# Altium PCB Orient3.PcbDoc (part 1 of 2)
Units mil, origin at the board's own origin, x right, y up, seen from the top; angles counter-clockwise.
Board outline 1900 x 1950 mil, 2 copper layers (Top Layer, Bottom Layer); 77 components, 65 nets, 289 pads, 114 vias.
Unrouted connection lines stored in the file: 34.
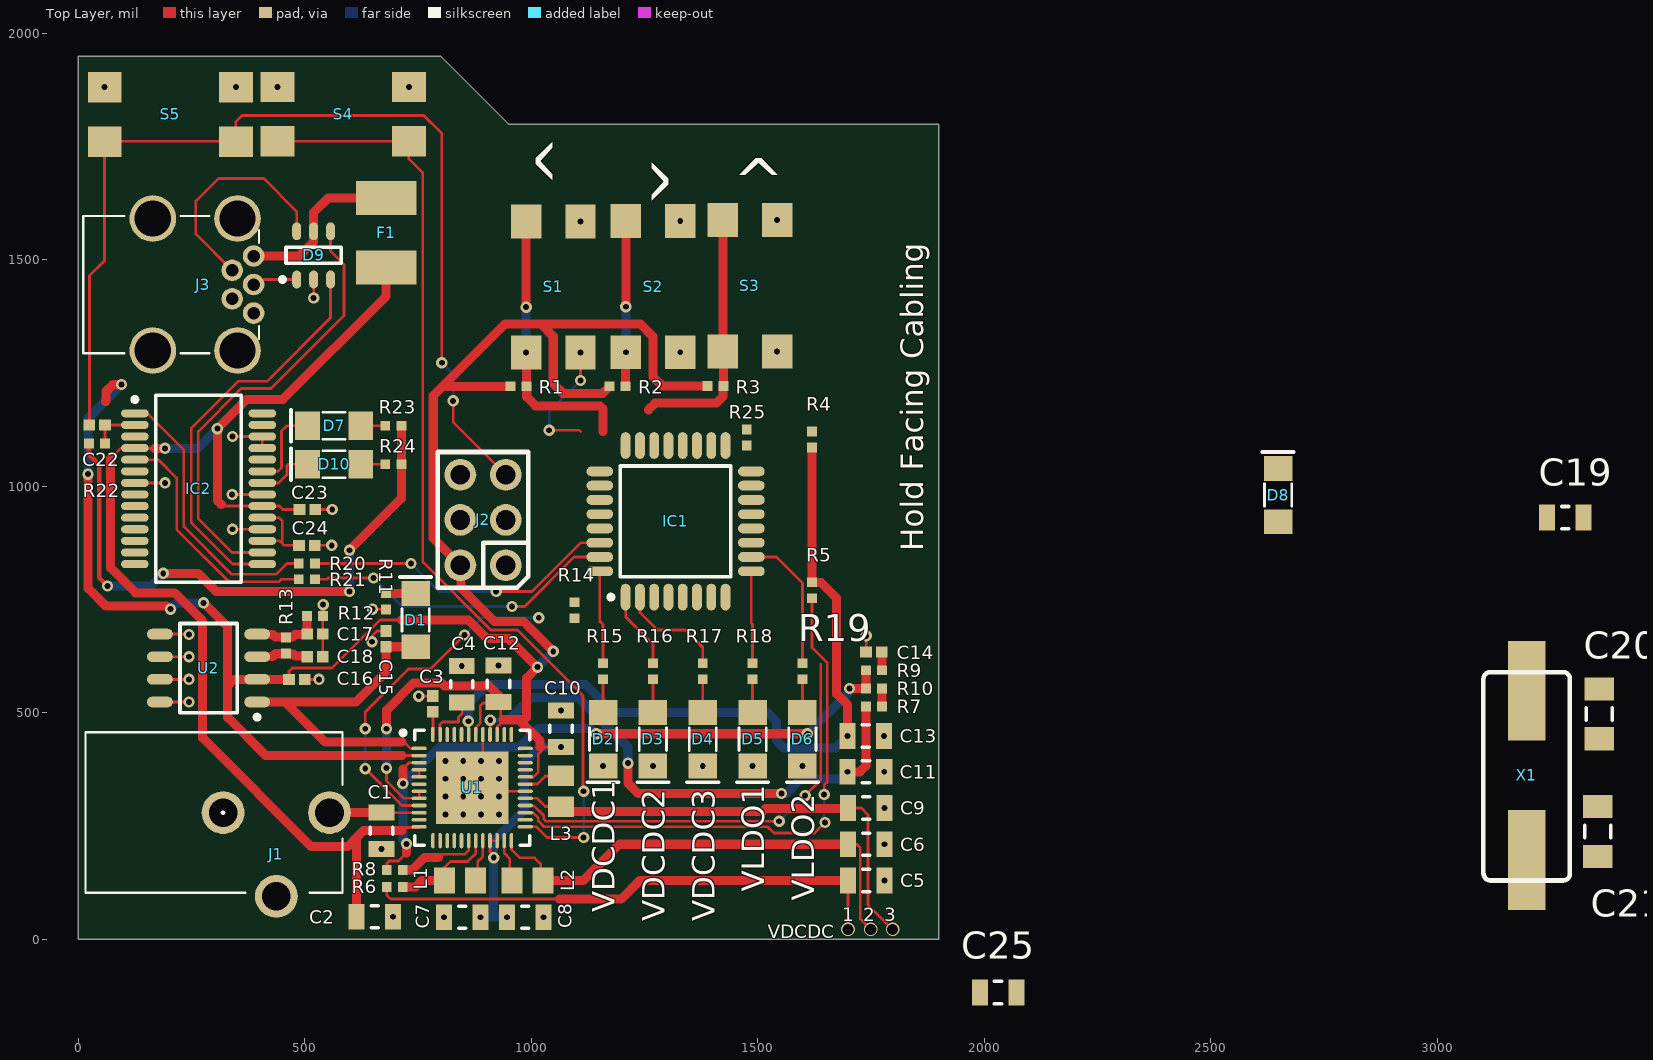
[diagram p0: Top Layer view]
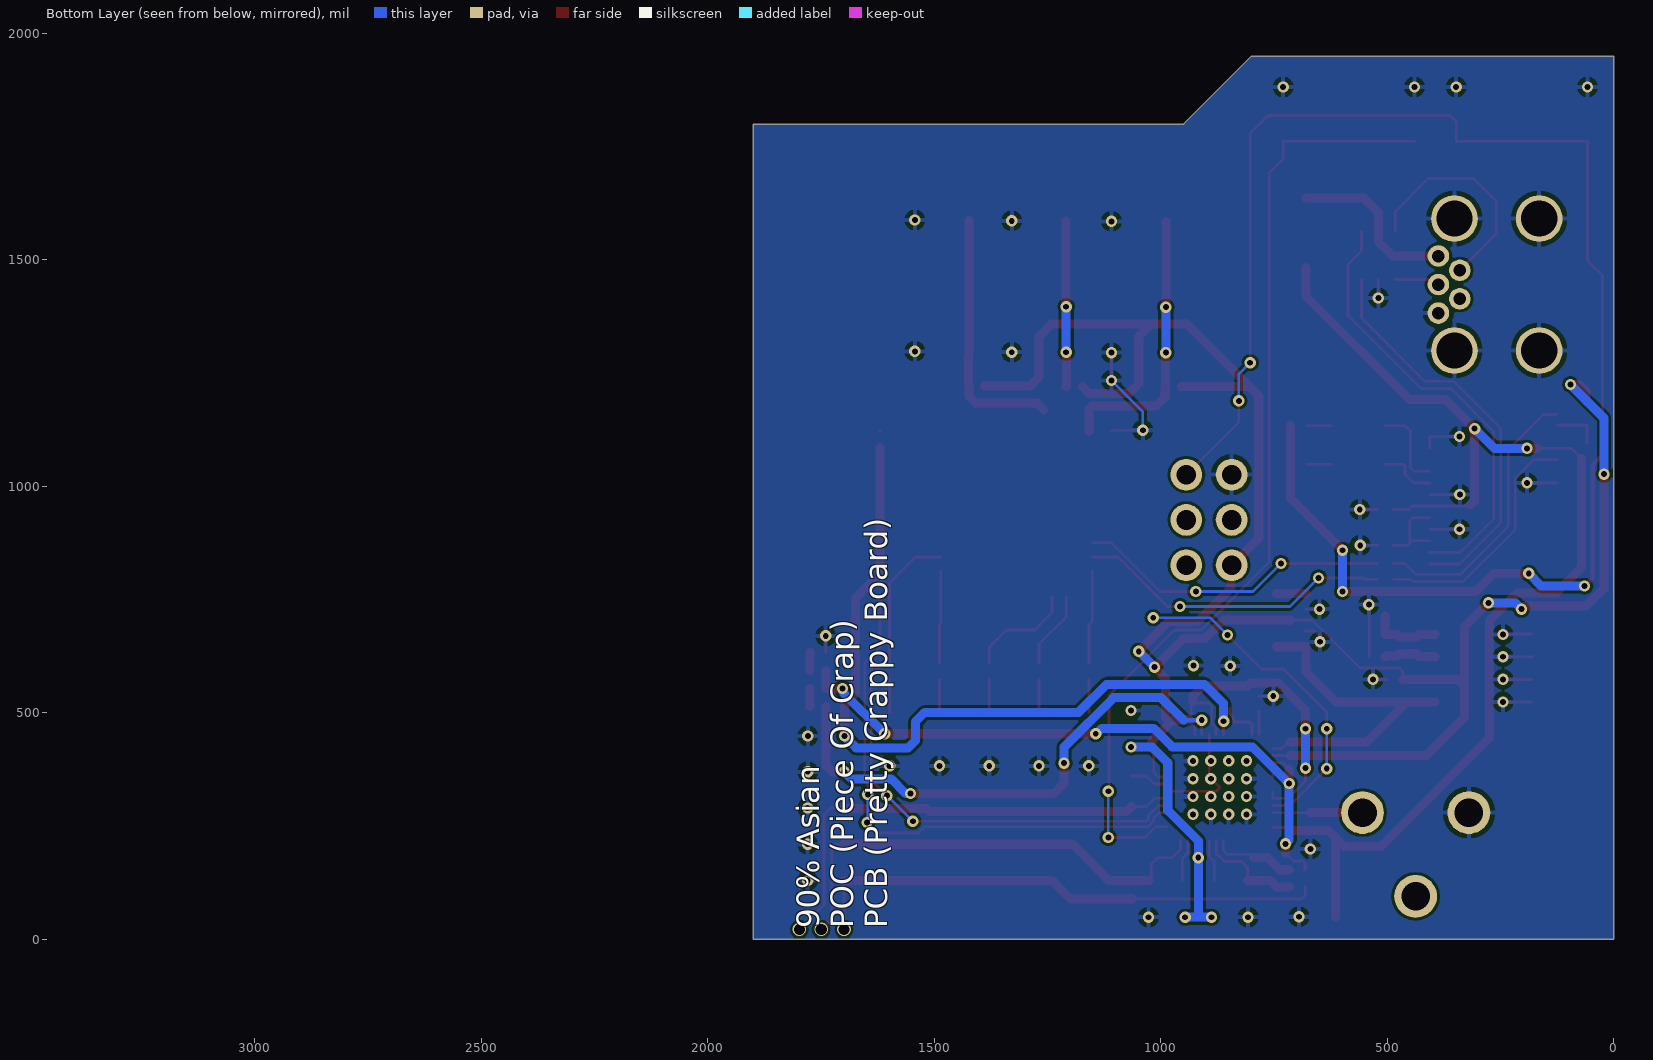
[diagram p1: Bottom Layer view, seen from below]
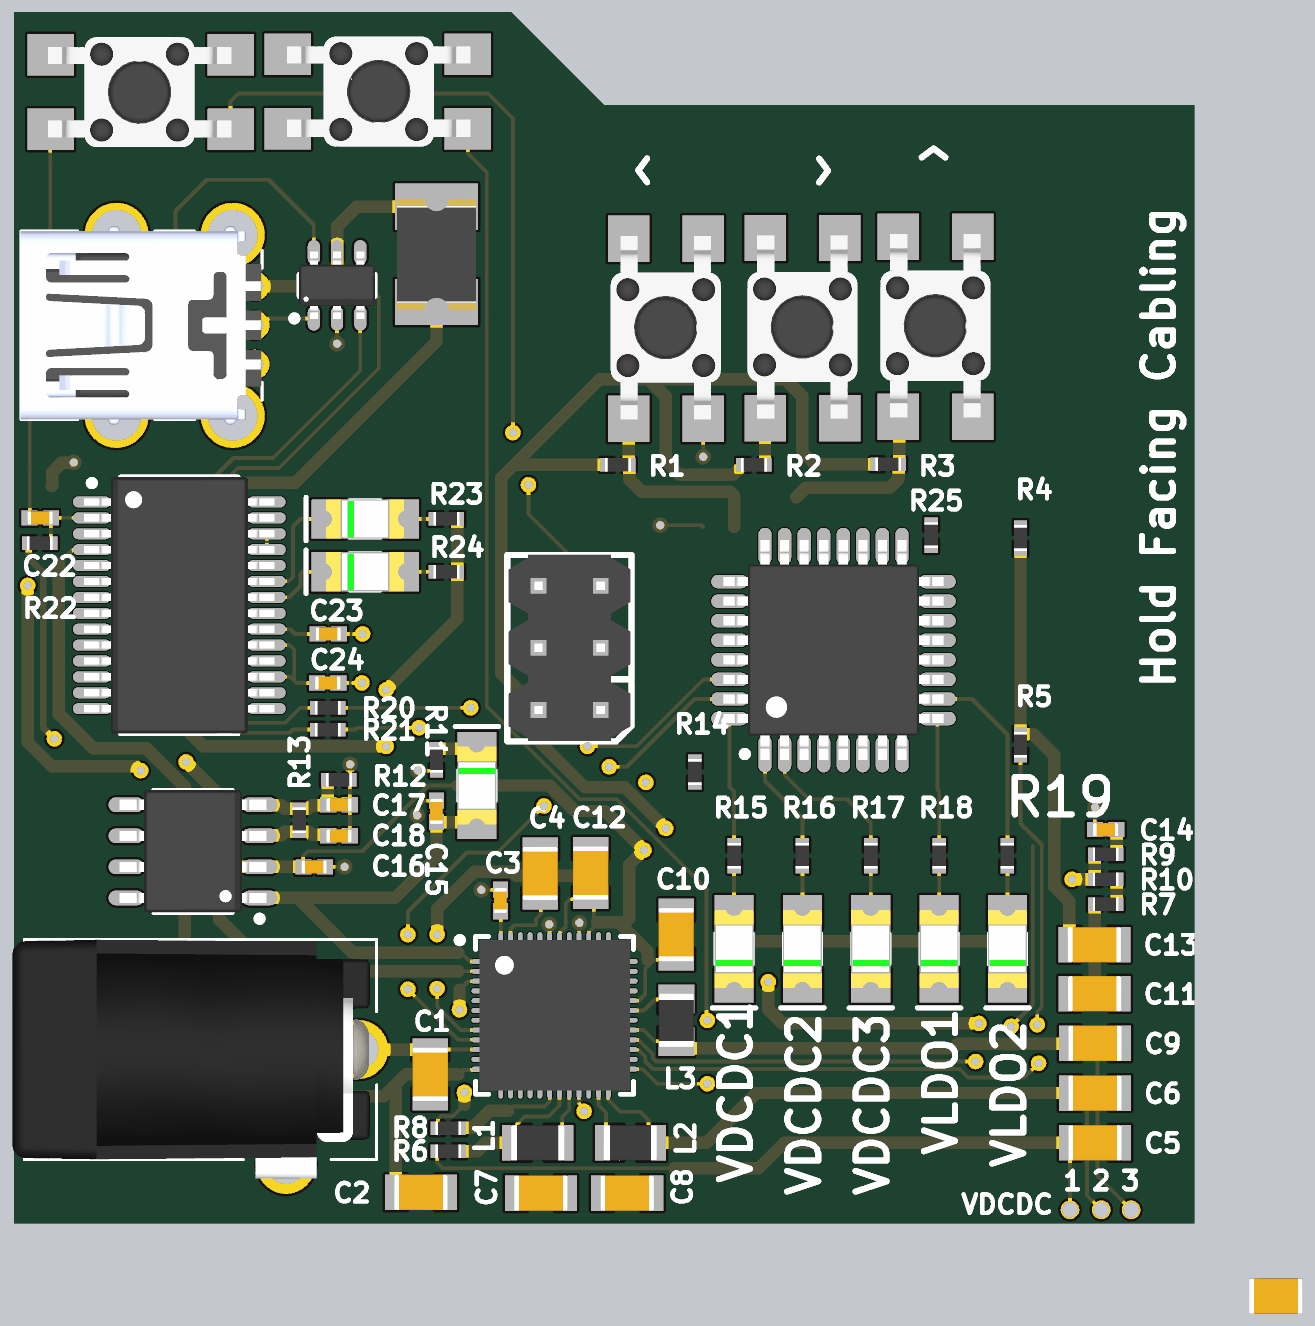
[diagram p2: 3D render of the assembled board from above, using the file's embedded part models]

## Layer stack, top to bottom
Top Solder: solder mask 0.4, Solder Resist, Dk 3.5
Top Layer: signal copper 1.4
Dielectric 1: dielectric 12.6, FR-4, Dk 4.8
Bottom Layer: signal copper 1.4
Bottom Solder: solder mask 0.4, Solder Resist, Dk 3.5

## Board outline
800,1950 950,1800 1900,1800 1900,0 0,0 0,1950

## Design rules (kind name [scope] priority, off if disabled: settings)
Clearance [All] p1: gap=6 ignorepadtopadclearanceinfootprint=FALSE except(0: Arc-Hole Track-Hole SMDPad-Hole THPad-Hole Via-Hole Fill-Hole Poly-Hole Region-Hole Text-Hole)
PlaneConnect [All] p1: pad.planeconnectstyle=Relief pad.reliefexpansion=20 pad.reliefentries=4 pad.reliefconductorwidth=10 pad.reliefairgap=10 via.planeconnectstyle=Direct via.reliefexpansion=20 via.reliefentries=4 via.reliefconductorwidth=10 via.reliefairgap=10
PolygonConnect [All] p1: connectstyle=Relief reliefconductorwidth=10 reliefentries=4 polygonreliefangle="90 Angle" airgapwidth=10
RoutingVias [All] p1: holewidth=13 width=25 viastyle="Through Hole" minholewidth=13 minwidth=25 maxholewidth=28 maxwidth=50
SolderMaskExpansion [All] p1: expansion=4
Width [All] p1: maxlimit=20 minlimit=6 preferedwidth=6 minimp=50.000000 maximp=50.000000 favimp=50.000000
29 further rules are at their usual default settings.

## Classes and differential pairs
component class POC_Power_Management: C1 C2 C3 C4 C5 C6 C7 C8 C9 C10 C11 C12 C13 C14 C15 C16 C17 C18 C19 C20 C24 C25 D1 D2 D3 D4 D5 D6 D7 D8 D9 F1 IC1 IC2 J1 J2 J3 L1 L2 L3 R1 R3 R9 R13 R14 R17 R19 R20 R22 R23 R24 S1 S3 U1 U2 X1

## Components (designator, comment, footprint, x,y, rotation, side; value= is the part's Value field where it differs from the comment)
C1 "C2012X6S1A106K085AC" CAP0805 670,240 r270 top
C2 "C2012X6S1A106K085AC" CAP0805 655,50 r0 top
C3 "C0402C104K4RACTU" CAP0402 783,520 r90 top
C4 "C2012X6S1A106K085AC" CAP0805 847,563.35 r90 top
C5 "C2012X6S1A106K085AC" CAP0805 1740,130 r180 top
C6 "C2012X6S1A106K085AC" CAP0805 1740,210 r180 top
C7 "C2012X6S1A106K085AC" CAP0805 848,49 r180 top
C8 "C2012X6S1A106K085AC" CAP0805 987,49 r0 top
C9 "C2012X6S1A106K085AC" CAP0805 1740,290 r180 top
C10 "C2012X6S1A106K085AC" CAP0805 1066,465 r90 top
C11 "C2012X6S1A106K085AC" CAP0805 1739.28,370 r180 top
C12 "C2012X6S1A106K085AC" CAP0805 928,564 r90 top
C13 "C2012X6S1A106K085AC" CAP0805 1739,449 r180 top
C14 "C1005X5R0J225K050BC" CAP0402 1757,634 r0 top
C15 "C1005X5R0J225K050BC" CAP0402 680,663.32 r270 top
C16 "C1005X5R0J225K050BC" CAP0402 483,574 r0 top
C17 "GRM155R71H471KA01D" CAP0402 523,674 r0 top
C18 "C0402C104K4RACTU" CAP0402 523,624 r0 top
C19 "CL21A226MQQNNNE" CAP0805 3283,931 r0 top value="CAP CER 22UF 16V X5R 1206"
C20 "22pF" CAP1206 3358,498 r90 top value="CAP CER 22PF 16V C0G/NP0 1206"
C21 "22pF" CAP1206 3355,238 r270 top value="CAP CER 22PF 16V C0G/NP0 1206"
C22 "CC0402KRX5R5BB105" CAP0402 42,1135.75 r180 top value="CAP CER 1UF 16V X7R 1206"
C23 "CL21A226MQQNNNE" CAP0402 506,949 r180 top value="CAP CER 22UF 16V X5R 1206"
C24 "CL21A226MQQNNNE" CAP0402 505,870 r180 top value="CAP CER 22UF 16V X5R 1206"
C25 "CL21A226MQQNNNE" CAP0805 2031,-117 r0 top value="CAP CER 22UF 16V X5R 1206"
D1 "Red" LED 745,705 r0 top value="LED RED CLEAR 1206 SMD"
D2 "Red" LED 1159,442 r180 top value="LED RED CLEAR 1206 SMD"
D3 "Red" LED 1269,442 r180 top value="LED RED CLEAR 1206 SMD"
D4 "Red" LED 1379,442 r180 top value="LED RED CLEAR 1206 SMD"
D5 "Red" LED 1489,442 r180 top value="LED RED CLEAR 1206 SMD"
D6 "Red" LED 1599,442 r180 top value="LED RED CLEAR 1206 SMD"
D7 "Red" LED 565,1134 r90 top value="LED RED CLEAR 1206 SMD"
D8 "Red" LED 2649,981 r0 top value="LED RED CLEAR 1206 SMD"
D9 "IP4234CZ6,125" TSOP-6 520,1510 r90 top value="TVS DIODE 5.5V 6TSOP"
D10 "Red" LED 565,1049 r90 top value="LED RED CLEAR 1206 SMD"
F1 "MF-MSMF050-2" FUSE 680,1560 r90 top value="PTC RESET FUSE 15V 500MA 1812"
IC1 "ATMEGA328P-ANR" TQFP-32 1319,923 r90 top value="IC MCU 8BIT 32KB FLASH 32TQFP"
IC2 "FT232RL" SSOP-28 266,995 r0 top value="IC USB FS SERIAL UART 28-SSOP"
J1 "Power Jack" Power_Jack 555,280 r180 top value="CONN PWR JACK 2X5.5MM SOLDER"
J2 "ICSP Header" ICSP 894,926 r180 top
J3 "XM7D-0512" XM7D-0512 160,1591.34 r0 top value="CONN RCPT USB2.0 MINI B 5P R/A"
L1 "150OHM800mA" FB0805 843,130 r180 top
L2 "150OHM800mA" FB0805 992,130 r0 top
L3 "150OHM800mA" FB0805 1066,327 r270 top
R1 "RC0402FR-07100KL" RES0402 972,1221 r0 top
R2 "RC0402FR-07100KL" RES0402 1191,1221 r0 top
R3 "RC0402FR-07100KL" RES0402 1407,1222 r0 top
R4 "RC0402FR-071K5L" RES0402 1620,1103.34 r270 top
R5 "RC0402FR-071K5L" RES0402 1620,770.66 r90 top
R6 "RC0402JR-070RL" RES0402 699,116 r180 top
R7 "RC0402JR-070RL" RES0402 1757,514 r0 top
R8 "RC0402JR-070RL" RES0402 699,153 r0 top
R9 "RC0402JR-070RL" RES0402 1757,594 r0 top
R10 "RC0402JR-070RL" RES0402 1757,554 r0 top
R11 "RC0402FR-07820RL" RES0402 680,746.28 r270 top
R12 "RC0402FR-07470KL" RES0402 523,714 r180 top
R13 "RC0402FR-07280KL" RES0402 459,649 r270 top
R14 "RC0402FR-071KL" RES0402 1096,726.72 r90 top value="RES 1K OHM 1% 1/2W 1206"
R15 "RC0402FR-07820RL" RES0402 1159,592 r90 top
R16 "RC0402FR-07820RL" RES0402 1269,592 r90 top
R17 "RC0402FR-07820RL" RES0402 1379,592 r90 top
R18 "RC0402FR-07820RL" RES0402 1489,592 r90 top
R19 "RC0402FR-07820RL" RES0402 1599,592 r90 top
R20 "RC0402FR-071KL" RES0402 505,830 r0 top value="RES 1K OHM 1% 1/2W 1206"
R21 "RC0402FR-071KL" RES0402 505,795 r0 top value="RES 1K OHM 1% 1/2W 1206"
R22 "RC0402FR-071KL" RES0402 41.5,1095 r180 top value="RES 1K OHM 1% 1/2W 1206"
R23 "RC0402FR-071KL" RES0402 696,1134 r0 top value="RES 1K OHM 1% 1/2W 1206"
R24 "RC0402FR-071KL" RES0402 696,1049 r0 top value="RES 1K OHM 1% 1/2W 1206"
R25 "RC0402FR-071KL" RES0402 1476,1108 r270 top value="RES 1K OHM 1% 1/2W 1206"
S1 "TL3305AF160QG" Switch 1051,1442 r0 top value="SWITCH TACTILE SPST-NO 50MA 12V"
S2 "TL3305AF160QG" Switch 1271,1443 r0 top value="SWITCH TACTILE SPST-NO 50MA 12V"
S3 "TL3305AF160QG" Switch 1485,1445 r0 top value="SWITCH TACTILE SPST-NO 50MA 12V"
S4 "TL3305AF160QG" Switch 587,1820 r270 top value="SWITCH TACTILE SPST-NO 50MA 12V"
S5 "TL3305AF160QG" Switch 202,1823 r90 top value="SWITCH TACTILE SPST-NO 50MA 12V"
U1 "TPS65217C" PVQFN-48 870,335 r0 top
U2 "TL5209" SOIC-8 288,599 r180 top
X1 "16MHz" Crystal 3198,362 r90 top value="CRYSTAL 16.0000MHZ 18PF SMD"

## Footprints (in the part's own frame and the unit in brackets; to place one, negate y for a bottom-side part, rotate by r counter-clockwise, add the part's x,y. Pads: shape width x height; smd on the part's side, far side on the other; paste and mask are expansions set on the pad)
CAP0402 [mm] "Chip Capacitor, 2-Leads, Body 1.00x0.50mm, IPC Medium Density"
  rect 0.66x0.62 smd: 1(-0.44,0) 2(0.44,0)
  body extent -0.53,-0.28 0.53,0.28, height 0.55
CAP0805 [mm] "Chip Capacitor, 2-Leads, Body 2.00x1.25mm, IPC Medium Density"
  rect 0.9x1.45 smd: 1(-1.025,0) 2(1.025,0)
  silkscreen extent -0.2,-0.63 0.2,0.63, body extent -1.1,-0.72 1.1,0.72, height 1.45
CAP1206 [mm] "Chip Capacitor, 2-Leads, Body 3.20x1.50mm, IPC Medium Density"
  rect 1.3x1.65 smd: 1(-1.4,0) 2(1.4,0)
  silkscreen extent -0.35,-0.72 0.35,0.72, body extent -1.7,-0.8 1.7,0.8, height 0.56
Crystal [mm]
  rect 5.6x2.1 smd: 1(-4.75,0) 2(4.75,0)
  silkscreen extent -5.89,-2.43 5.79,2.42, body extent -6.7,-2.43 6.6,2.42, height 4
FB0805 [mm] "Chip Inductor, 2-Leads, Body 2.00x1.25mm, IPC Medium Density"
  rect 1.17x1.47 smd: 1(-0.87,0) 2(0.87,0)
  body extent -1.1,-0.72 1.1,0.72, height 1.1
FUSE [mm]
  rect 1.9x3.4 smd: 1(1.95,0) 2(-1.95,0)
  body extent -2.28,-1.62 2.27,1.62, height 0.68
ICSP [mil]
  round 70 hole 43.31: 1(-50,100) 2(50,100) 3(-50,0) 4(50,0) 5(-50,-100) 6(50,-100)
  silkscreen extent -100,-150 100,150, body extent -99,-151 98,149, height 329
LED [mil]
  rect 63x55 smd: 1(0,59) 2(0,-59)
  silkscreen extent -35,-25 35,95, body extent -32,-63 31,63, height 44
Power_Jack [mm]
  round 2.4 hole 1.6: 1(0,0) 2(5.969,0) 3(2.977,4.7)
  silkscreen extent -0.72,-4.5 13.68,4.5, body extent -0.47,-4.49 14.15,5.28, height 10.68
PVQFN-48 [mm] "QFN, 48-Leads, Body 6.00x6.00mm, Pitch 0.40mm, Thermal Pad 2.80x2.80mm, IPC Medium Density"
  oval 0.85x0.2 smd mask+0.05: 1(-2.975,2.2) 2(-2.975,1.8) 3(-2.975,1.4) 4(-2.975,1) 5(-2.975,0.6) 6(-2.975,0.2) 7(-2.975,-0.2) 8(-2.975,-0.6) 9(-2.975,-1) 10(-2.975,-1.4) 11(-2.975,-1.8) 12(-2.975,-2.2) 25(2.975,-2.2) 26(2.975,-1.8) 27(2.975,-1.4) 28(2.975,-1) 29(2.975,-0.6) 30(2.975,-0.2) 31(2.975,0.2) 32(2.975,0.6) 33(2.975,1) 34(2.975,1.4) 35(2.975,1.8) 36(2.975,2.2)
  oval 0.2x0.85 smd mask+0.05: 13(-2.2,-2.975) 14(-1.8,-2.975) 15(-1.4,-2.975) 16(-1,-2.975) 17(-0.6,-2.975) 18(-0.2,-2.975) 19(0.2,-2.975) 20(0.6,-2.975) 21(1,-2.975) 22(1.4,-2.975) 23(1.8,-2.975) 24(2.2,-2.975) 37(2.2,2.975) 38(1.8,2.975) 39(1.4,2.975) 40(1,2.975) 41(0.6,2.975) 42(0.2,2.975) 43(-0.2,2.975) 44(-0.6,2.975) 45(-1,2.975) 46(-1.4,2.975) 47(-1.8,2.975) 48(-2.2,2.975)
  rect 4.05x4.05 smd: 49(0,0)
  silkscreen extent -4,-3.22 3.22,3.22, body extent -3.08,-3.08 3.08,3.08, height 1
RES0402 [mm] "Chip Resistor, 2-Leads, Body 1.00x0.50mm, IPC Medium Density"
  rect 0.55x0.55 smd: 1(-0.45,0) 2(0.45,0)
  body extent -0.52,-0.28 0.53,0.28, height 0.4
SOIC-8 [mm] "SOIC, 8-Leads, Body 4.90x3.90mm, Pitch 1.27mm, IPC Medium Density"
  oval 1.45x0.6 smd: 1(-2.725,1.905) 2(-2.725,0.635) 3(-2.725,-0.635) 4(-2.725,-1.905) 5(2.725,-1.905) 6(2.725,-0.635) 7(2.725,0.635) 8(2.725,1.905)
  silkscreen extent -2.85,-2.5 1.6,2.88, body extent -3,-2.5 3,2.5, height 1.75
SSOP-28 [mm] "SOP, 28-Leads, Body 10.28x5.30mm, Pitch 0.65mm, IPC Medium Density"
  oval 1.55x0.45 smd mask+0.05: 1(-3.575,4.225) 2(-3.575,3.575) 3(-3.575,2.925) 4(-3.575,2.275) 5(-3.575,1.625) 6(-3.575,0.975) 7(-3.575,0.325) 8(-3.575,-0.325) 9(-3.575,-0.975) 10(-3.575,-1.625) 11(-3.575,-2.275) 12(-3.575,-2.925) 13(-3.575,-3.575) 14(-3.575,-4.225) 15(3.575,-4.225) 16(3.575,-3.575) 17(3.575,-2.925) 18(3.575,-2.275) 19(3.575,-1.625) 20(3.575,-0.975) 21(3.575,-0.325) 22(3.575,0.325) 23(3.575,0.975) 24(3.575,1.625) 25(3.575,2.275) 26(3.575,2.925) 27(3.575,3.575) 28(3.575,4.225)
  silkscreen extent -3.7,-5.25 2.4,5.25, body extent -3.89,-5.25 3.89,5.25, height 2
Switch [mm]
  rect 1.7x1.9 smd: 1(1.479,-3.727) 2(1.479,3.639) 3(-1.569,-3.727) 4(-1.569,3.639)
  body extent -2.3,-3.75 2.2,3.75, height 3.8
TQFP-32 [mm] "TQFP, 32-Leads, Body 7.00x7.00mm, Pitch 0.80mm, IPC Medium Density"
  oval 1.5x0.55 smd mask+0.05: 1(-4.25,2.8) 2(-4.25,2) 3(-4.25,1.2) 4(-4.25,0.4) 5(-4.25,-0.4) 6(-4.25,-1.2) 7(-4.25,-2) 8(-4.25,-2.8) 17(4.25,-2.8) 18(4.25,-2) 19(4.25,-1.2) 20(4.25,-0.4) 21(4.25,0.4) 22(4.25,1.2) 23(4.25,2) 24(4.25,2.8)
  oval 0.55x1.5 smd mask+0.05: 9(-2.8,-4.25) 10(-2,-4.25) 11(-1.2,-4.25) 12(-0.4,-4.25) 13(0.4,-4.25) 14(1.2,-4.25) 15(2,-4.25) 16(2.8,-4.25) 25(2.8,4.25) 26(2,4.25) 27(1.2,4.25) 28(0.4,4.25) 29(-0.4,4.25) 30(-1.2,4.25) 31(-2,4.25) 32(-2.8,4.25)
  silkscreen extent -4.37,-3.1 3.1,3.75, body extent -4.5,-4.5 4.5,4.5, height 1.2
TSOP-6 [mm] "TSOP, 6-Leads, Body 2.90x1.50mm, Pitch 0.95mm, IPC Medium Density"
  oval 1x0.5 smd: 1(-1.35,0.95) 2(-1.35,0) 3(-1.35,-0.95) 4(1.35,-0.95) 5(1.35,0) 6(1.35,0.95)
  silkscreen extent -1.47,-1.55 0.45,1.87, body extent -1.38,-1.55 1.38,1.55, height 1.1
XM7D-0512 [mm]
  round 1.208 hole 0.7 mask+0.05: 1(5.777,-2.1) 2(4.577,-2.9) 3(5.777,-3.7) 4(4.577,-4.5) 5(5.777,-5.3)
  round 2.616 hole 2.032: SH1(0.127,-7.4) SH2(4.877,-7.4) SH3(4.877,0) SH4(0.127,0)
  silkscreen extent -3.77,-7.55 6.08,0.15, body extent -3.8,-7.75 6.05,0.35, height 3.95

## Part data
C1 C2 C4 C5 C6 C7 C8 C9 C10 C11 C12 C13: library part CAP_10uF, "MLCC 10uF 0805 SMD", Capacitance=10uF, Case/Package=0805, Case Code (Metric)=2012, Dielectric=X6S, Dielectric Material=Ceramic, Manufacturer=TDK, Max Operating Temperature=105°C, Min Operating Temperature=-55°C, Package Quantity=4000, Supplier Part Number 1=445-7613-1-ND, Tolerance=10%, Voltage Rating=10V, Case Code (Imperial)=0805, ComponentLink3Description=Datasheet, ComponentLink3URL=https://datasheet.ciiva.com/6290/tdkmlcccaprange-6290501.pdf?src-supplier=Digi-Key, Composition=Ceramic, Depth=1.25mm, Height=1.25mm, Lead Free="Lead Free", Length=2mm, Manufacturer Part Number=C2012X6S1A106K085AC, Mount="Surface Mount", Packaging="Tape and Reel", Pricing 1="1=0.30000, 10=0.20500, 100=0.11610, 500=0.08198, 1000=0.07173 (USD)", REACH SVHC="No SVHC", RoHS=Yes, Stock 1=46852, Supplier 1=Digi-Key, Termination=SMD/SMT, Thickness=0.037inch, Voltage Rating (DC)=10V, Weight=0.000194oz, Width=0.049inch
C3 C18: library part CAP_100nF, "MLCC 100nF 0402 SMD", Capacitance=100nF, Case/Package=0402, Case Code (Metric)=1005, Dielectric=X7R, Manufacturer=KEMET, Max Operating Temperature=125°C, Min Operating Temperature=-55°C, Package Quantity=10000, Supplier Part Number 1=399-3521-1-ND, Tolerance=10%, Voltage Rating=16V, Case Code (Imperial)=0402, ComponentLink2Description=Datasheet, ComponentLink2URL=https://datasheet.ciiva.com/18192/getdatasheetpartid-385384-18192412.pdf?src-supplier=Verical, Contact Plating=Tin,Matte, Depth=0.5mm, Dissipation Factor=3.5%, Height=0.5mm, Length=1mm, Manufacturer Part Number=C0402C104K4RACTU, Mount="Surface Mount", Packaging="Tape and Reel", Pricing 1="1=0.10000, 10=0.04200, 100=0.01860, 500=0.01328, 1000=0.01044, 2500=0.00949, 5000=0.00873 (USD)", Radiation Hardening=No, RoHS=Yes, Stock 1=6512243, Supplier 1=Digi-Key, Termination=SMD/SMT, Voltage Rating (DC)=16V, Width=0.5mm
C14 C15 C16: library part CAP_2.2uF, "MLCC 2.2uF 0402 SMD", Capacitance=2.2uF, Case/Package=0402, Case Code (Metric)=1005, Dielectric=X5R, Dielectric Material=Ceramic, Manufacturer=TDK, Max Operating Temperature=85°C, Min Operating Temperature=-55°C, Package Quantity=1, Supplier Part Number 1=445-6847-1-ND, Tolerance=10%, Voltage=6.3V, Case Code (Imperial)=0402, ComponentLink7Description=Datasheet, ComponentLink7URL=https://product.tdk.com/info/en/catalog/datasheets/mlcc_commercial_general_en.pdf?ref_disty=digikey, Composition=Ceramic, Depth=0.5mm, Height=0.5mm, Lead Free="Lead Free", Length=1mm, Manufacturer Part Number=C1005X5R0J225K050BC, Mount="Surface Mount", Number of Pins=2, Packaging="Tape and Reel", Radiation Hardening=No, REACH SVHC="No SVHC", RoHS=Yes, Supplier 1=Digi-Key, Termination=SMD/SMT, Thickness=0.022inch, Voltage Rating=6.3V, Voltage Rating (DC)=6.3V, Weight=2.3E-05oz, Width=0.02inch
C17: library part CAP_470pF, "MLCC 470pF 0402 SMD", Capacitance=470pF, Case/Package=0402, Case Code (Metric)=1005, Dielectric=X7R, Manufacturer=Murata, Max Operating Temperature=125°C, Min Operating Temperature=-55°C, Package Quantity=1, Supplier Part Number 1=490-1300-1-ND, Tolerance=10%, Voltage=50V, Case Code (Imperial)=0402, ComponentLink1Description=https://datasheet.ciiva.com/11786/0900766b80ef921d-11786912.pdf?src-supplier=RSComponents, ComponentLink1URL=https://datasheet.ciiva.com/11786/0900766b80ef921d-11786912.pdf?src-supplier=RSComponents, ComponentLink2Description=https://datasheet.ciiva.com/18101/getdatasheetpartid-37722-18101030.pdf?src-supplier=Verical, ComponentLink2URL=https://datasheet.ciiva.com/18101/getdatasheetpartid-37722-18101030.pdf?src-supplier=Verical, ComponentLink3Description=https://datasheet.ciiva.com/19476/1856505-19476137.pdf?src-supplier=Jameco, ComponentLink3URL=https://datasheet.ciiva.com/19476/1856505-19476137.pdf?src-supplier=Jameco, ComponentLink4Description=https://datasheet.ciiva.com/29199/454340-da-01-en-vs-kondensator-0402-29199656.pdf?src-supplier=Conrad, ComponentLink4URL=https://datasheet.ciiva.com/29199/454340-da-01-en-vs-kondensator-0402-29199656.pdf?src-supplier=Conrad, ComponentLink5Description=https://datasheet.ciiva.com/129/partnumbering-e-01-129843.pdf?src-supplier=Digi-Key, ComponentLink5URL=https://datasheet.ciiva.com/129/partnumbering-e-01-129843.pdf?src-supplier=Digi-Key, ComponentLink6Description=https://datasheet.ciiva.com/129/partnumbering-e-01-129844.pdf?src-supplier=Digi-Key, ComponentLink6URL=https://datasheet.ciiva.com/129/partnumbering-e-01-129844.pdf?src-supplier=Digi-Key, ComponentLink7Description=https://datasheet.ciiva.com/129/partnumbering-e-01-129845.pdf?src-supplier=Digi-Key, ComponentLink7URL=https://datasheet.ciiva.com/129/partnumbering-e-01-129845.pdf?src-supplier=Digi-Key, ComponentLink8Description=https://datasheet.ciiva.com/14116/grmseries-highdielectrictype-eng-14116837.pdf?src-supplier=Distrelec, ComponentLink8URL=https://datasheet.ciiva.com/14116/grmseries-highdielectrictype-eng-14116837.pdf?src-supplier=Distrelec, ComponentLink9Description=https://datasheet.ciiva.com/22698/608985-22698425.pdf?src-supplier=Element14, ComponentLink9URL=https://datasheet.ciiva.com/22698/608985-22698425.pdf?src-supplier=Element14, ComponentLink10Description=https://datasheet.ciiva.com/16199/product-16199180.pdf?src-supplier=Future+Electronics, ComponentLink10URL=https://datasheet.ciiva.com/16199/product-16199180.pdf?src-supplier=Future+Electronics, ComponentLink11Description=https://datasheet.ciiva.com/7937/608985-7937630.pdf?src-supplier=Element14, ComponentLink11URL=https://datasheet.ciiva.com/7937/608985-7937630.pdf?src-supplier=Element14, Depth=0.5mm, Height=0.5mm, Lead Free="Lead Free", Length=1mm, Manufacturer Part Number=GRM155R71H471KA01D, Material=Ceramic, Mount="Surface Mount", Number of Pins=2, Packaging="Tape and Reel", Pricing 1="1=0.10000, 10=0.04900, 100=0.02200, 500=0.01572, 1000=0.01235, 2500=0.01122, 5000=0.01033 (USD)", Radiation Hardening=No, REACH SVHC="No SVHC", RoHS=Yes, Stock 1=1824670, Supplier 1=Digi-Key, Termination=SMD/SMT, Thickness=0.022inch, Voltage Rating=50V, Voltage Rating (DC)=50V, Width=0.02inch
C19 C25: library part CAP_22uF, "MLCC 22uF 0805 SMD", Capacitance=22uF, Case/Package=0805, Case Code (Metric)=2012, Dielectric=X5R, Manufacturer=Samsung, Max Operating Temperature=85°C, Min Operating Temperature=-55°C, Package Quantity=2000, Supplier Part Number 1=1276-1100-1-ND, Tolerance=20%, Voltage Rating=6.3V, Case Code (Imperial)=0805, ComponentLink1Description=https://datasheet.ciiva.com/25796/cl21a226mqqnnne-25796195.pdf?src-supplier=Digi-Key, ComponentLink1URL=https://datasheet.ciiva.com/25796/cl21a226mqqnnne-25796195.pdf?src-supplier=Digi-Key, ComponentLink2Description=https://datasheet.ciiva.com/26838/getdatasheetpartid-357607-26838611.pdf?src-supplier=Verical, ComponentLink2URL=https://datasheet.ciiva.com/26838/getdatasheetpartid-357607-26838611.pdf?src-supplier=Verical, ComponentLink3Description=https://datasheet.ciiva.com/16361/cl21a226mqqnnne-16361189.pdf?src-supplier=Future+Electronics, ComponentLink3URL=https://datasheet.ciiva.com/16361/cl21a226mqqnnne-16361189.pdf?src-supplier=Future+Electronics, ComponentLink4Description=https://datasheet.ciiva.com/26787/cl21a226mqqnnne-26787006.pdf?src-supplier=IIIC, ComponentLink4URL=https://datasheet.ciiva.com/26787/cl21a226mqqnnne-26787006.pdf?src-supplier=IIIC, Contact Plating=Tin, Depth=1.25mm, Digikey Link=https://www.digikey.com/product-detail/en/CL31A226MOCLNNC/1276-2728-1-ND/3890814/?itemSeq=304982363, Digikey Part=1276-2728-1-ND, Height=1.25mm, Lead Free="Lead Free", Length=2mm, Manufacturer Part Number=CL21A226MQQNNNE, Mount="Surface Mount", Packaging="Tape and Reel", Pricing 1="1=0.18000, 10=0.12100, 100=0.06140, 500=0.04204, 1000=0.03719 (USD)", Radiation Hardening=No, RoHS=Yes, Stock 1=4275367, Supplier 1=Digi-Key, Thickness=0.055inch, Voltage Rating (DC)=6.3V, Width=0.049inch
C20 C21: library part 1206_22pF, "22pF ±5% 16V Ceramic Capacitor C0G, NP0 1206 (3216 Metric)", Digikey Link=https://www.digikey.com/product-detail/en/885012008011/732-7867-1-ND/5454494/?itemSeq=304982362, Digikey Part=732-7867-1-ND
C22: library part CAP_1uF, "MLCC 1uF 0402 SMD", Capacitance=1uF, Case/Package=0402, Case Code (Metric)=1005, Dielectric=X5R, Dielectric Material=Ceramic, Manufacturer=Yageo, Max Operating Temperature=85°C, Min Operating Temperature=-55°C, Package Quantity=1, Supplier Part Number 1=311-1438-1-ND, Tolerance=10%, Voltage Rating=6.3V, Case Code (Imperial)=0402, ComponentLink1Description=https://datasheet.ciiva.com/5789/70765-5789520.pdf?src-supplier=Farnell, ComponentLink1URL=https://datasheet.ciiva.com/5789/70765-5789520.pdf?src-supplier=Farnell, ComponentLink2Description=https://datasheet.ciiva.com/176/mlccorderingcode-176609.pdf?src-supplier=Digi-Key, ComponentLink2URL=https://datasheet.ciiva.com/176/mlccorderingcode-176609.pdf?src-supplier=Digi-Key, ComponentLink3Description=https://datasheet.ciiva.com/16624/upy-gphc-x5r-4v-to-50v-12-16624731.pdf?src-supplier=Avnet+Europe, ComponentLink3URL=https://datasheet.ciiva.com/16624/upy-gphc-x5r-4v-to-50v-12-16624731.pdf?src-supplier=Avnet+Europe, ComponentLink4Description=https://datasheet.ciiva.com/8033/1525783-8033644.pdf?src-supplier=Element14, ComponentLink4URL=https://datasheet.ciiva.com/8033/1525783-8033644.pdf?src-supplier=Element14, ComponentLink5Description=https://datasheet.ciiva.com/176/mlccorderingcode-176610.pdf?src-supplier=Digi-Key, ComponentLink5URL=https://datasheet.ciiva.com/176/mlccorderingcode-176610.pdf?src-supplier=Digi-Key, ComponentLink6Description=https://datasheet.ciiva.com/176/mlccorderingcode-176611.pdf?src-supplier=Digi-Key, ComponentLink6URL=https://datasheet.ciiva.com/176/mlccorderingcode-176611.pdf?src-supplier=Digi-Key, ComponentLink7Description=https://datasheet.ciiva.com/8033/1525783-8033643.pdf?src-supplier=Element14, ComponentLink7URL=https://datasheet.ciiva.com/8033/1525783-8033643.pdf?src-supplier=Element14, ComponentLink8Description=https://datasheet.ciiva.com/28450/1359354-28450285.pdf?src-supplier=Element14, ComponentLink8URL=https://datasheet.ciiva.com/28450/1359354-28450285.pdf?src-supplier=Element14, ComponentLink9Description=https://datasheet.ciiva.com/8033/70765-8033646.pdf?src-supplier=Element14, ComponentLink9URL=https://datasheet.ciiva.com/8033/70765-8033646.pdf?src-supplier=Element14, ComponentLink10Description=https://datasheet.ciiva.com/11464/upy-gphc-x5r-4v-to-50v-12-11464863.pdf?src-supplier=Avnet, ComponentLink10URL=https://datasheet.ciiva.com/11464/upy-gphc-x5r-4v-to-50v-12-11464863.pdf?src-supplier=Avnet, Composition=Ceramic, Depth=0.5mm, Digikey Link=https://www.digikey.com/product-detail/en/C1206C105M4RACTU/399-8150-1-ND/3471873/?itemSeq=304982366, Digikey Part=399-8150-1-ND, Halogen Free="Halogen Free", Height=0.5mm, Lead Free="Lead Free", Length=1mm, Manufacturer Part Number=CC0402KRX5R5BB105, Mount="Surface Mount", Number of Pins=2, Packaging="Tape and Reel", Pricing 1="1=0.10000, 10=0.04700, 100=0.02100, 500=0.01502, 1000=0.01180, 2500=0.01072, 5000=0.00987 (USD)", Radiation Hardening=No, REACH SVHC="No SVHC", RoHS=Yes, Stock 1=41021902, Supplier 1=Digi-Key, Termination=SMD/SMT, Thickness=0.022inch, Voltage Rating (DC)=6.3V, Width=0.02inch
C23 C24: library part CAP_22uF, "MLCC 22uF 0402 SMD", Capacitance=22uF, Case/Package=0805, Case Code (Metric)=2012, Dielectric=X5R, Manufacturer=Samsung, Max Operating Temperature=85°C, Min Operating Temperature=-55°C, Package Quantity=2000, Supplier Part Number 1=1276-1100-1-ND, Tolerance=20%, Voltage Rating=6.3V, Case Code (Imperial)=0805, ComponentLink1Description=https://datasheet.ciiva.com/25796/cl21a226mqqnnne-25796195.pdf?src-supplier=Digi-Key, ComponentLink1URL=https://datasheet.ciiva.com/25796/cl21a226mqqnnne-25796195.pdf?src-supplier=Digi-Key, ComponentLink2Description=https://datasheet.ciiva.com/26838/getdatasheetpartid-357607-26838611.pdf?src-supplier=Verical, ComponentLink2URL=https://datasheet.ciiva.com/26838/getdatasheetpartid-357607-26838611.pdf?src-supplier=Verical, ComponentLink3Description=https://datasheet.ciiva.com/16361/cl21a226mqqnnne-16361189.pdf?src-supplier=Future+Electronics, ComponentLink3URL=https://datasheet.ciiva.com/16361/cl21a226mqqnnne-16361189.pdf?src-supplier=Future+Electronics, ComponentLink4Description=https://datasheet.ciiva.com/26787/cl21a226mqqnnne-26787006.pdf?src-supplier=IIIC, ComponentLink4URL=https://datasheet.ciiva.com/26787/cl21a226mqqnnne-26787006.pdf?src-supplier=IIIC, Contact Plating=Tin, Depth=1.25mm, Digikey Link=https://www.digikey.com/product-detail/en/CL31A226MOCLNNC/1276-2728-1-ND/3890814/?itemSeq=304982363, Digikey Part=1276-2728-1-ND, Height=1.25mm, Lead Free="Lead Free", Length=2mm, Manufacturer Part Number=CL21A226MQQNNNE, Mount="Surface Mount", Packaging="Tape and Reel", Pricing 1="1=0.18000, 10=0.12100, 100=0.06140, 500=0.04204, 1000=0.03719 (USD)", Radiation Hardening=No, RoHS=Yes, Stock 1=4275367, Supplier 1=Digi-Key, Thickness=0.055inch, Voltage Rating (DC)=6.3V, Width=0.049inch
D1 D2 D3 D4 D5 D6 D7 D10: library part LED_Red, "Red 638nm LED Indication - Discrete 1.8V 1206 (3216 Metric)", Supplier Part Number 1=160-1167-1-ND, Digikey Link=https://www.digikey.com/product-detail/en/LTST-C150CKT/160-1167-1-ND/269239/?itemSeq=304982368, Digikey Part=160-1167-1-ND, Supplier 1=Digi-Key
D8: library part 1206_RED_LED, "Red 638nm LED Indication - Discrete 1.8V 1206 (3216 Metric)", Digikey Link=https://www.digikey.com/product-detail/en/LTST-C150CKT/160-1167-1-ND/269239/?itemSeq=304982368, Digikey Part=160-1167-1-ND
D9: library part TVS_Diode, "Clamp Ipp Tvs Diode Surface Mount 6-TSOP", Supplier Part Number 1=1727-4717-1-ND, Digikey Link=https://www.digikey.com/product-detail/en/IP4234CZ6%2c125/1727-4717-1-ND/2531156/?itemSeq=304982369, Digikey Part=1727-4717-1-ND, Supplier 1=Digi-Key
F1: library part Fuse, "Polymeric PTC Resettable Fuse 15V 500mA Ih Surface Mount 1812 (4532 Metric), Concave", Supplier Part Number 1=MF-MSMF050-2CT-ND, Digikey Link=https://www.digikey.com/product-detail/en/MF-MSMF050-2/MF-MSMF050-2CT-ND/662842/?itemSeq=304982360, Digikey Part=MF-MSMF050-2CT-ND, Supplier 1=Digi-Key
IC1: library part ATMega328P, "AVR AVR® ATmega Microcontroller IC 8-Bit 20MHz 32KB (16K x 16) FLASH 32-TQFP (7x7)", Digikey Link=https://www.digikey.com/product-detail/en/ATMEGA328P-ANR/ATMEGA328P-ANRCT-ND/2774230/?itemSeq=304982365, Digikey Part=ATMEGA328P-ANRCT-ND
IC2: library part IC_FT232RL, "USB Bridge, USB to UART USB 2.0 UART Interface 28-SSOP", Supplier Part Number 1=768-1007-1-ND, Digikey Link=https://www.digikey.com/product-detail/en/FT232RL-REEL/768-1007-1-ND/1836402/?itemSeq=304982359, Digikey Part=768-1007-1-ND, Supplier 1=Digi-Key
J1: "Power Barrel Connector Jack 2.10mm ID (0.083\"), 5.50mm OD (0.217\") Through Hole, Right Angle", Supplier Part Number 1=CP-102A-ND, Digikey Link=https://www.digikey.com/product-detail/en/PJ-102A/CP-102A-ND/275425/?itemSeq=304982367, Digikey Part=CP-102A-ND, Supplier 1=Digi-Key
J2: library part HDR_ICSP, "2x3 Header for Arduino ICSP", Supplier Part Number 1=S2012EC-03-ND, Supplier 1=Digi-Key
J3: library part USB, "USB - mini B USB 2.0 Receptacle Connector 5 Position Through Hole, Right Angle", Supplier Part Number 1=OR1205-ND, Digikey Link=https://www.digikey.com/product-detail/en/XM7D-0512/OR1205-ND/4695531/?itemSeq=304982356, Digikey Part=OR1205-ND, Supplier 1=Digi-Key
L1 L2 L3: library part IND, "FERRITE 800MA 150 OHM 0805 SMD", Current Rating=800mA, DC Resistance (DCR)="150 mOhm Max", Impedance @ Frequency="150 Ohm @ 100MHz", Manufacturer="Laird-Signal Integrity Products", Manufacturer Part Number=LI0805H151R-10, Package / Case="0805 (2012 Metric)", Supplier Part Number 1=240-2384-6-ND, Category=Filters, ComponentLink1Description=http://www.lairdtech.com/WorkArea/linkit.aspx?LinkIdentifier=id&ItemID=4912, ComponentLink1URL=http://www.lairdtech.com/WorkArea/linkit.aspx?LinkIdentifier=id&ItemID=4912, Filter Type="Differential Mode - Single", Height (Max)="0.043\" (1.10mm)", Mounting Type="Surface Mount", Packaging=Digi-Reel®, Pricing 1="1=0.1, 10=0.07, 25=0.064, 50=0.0574, 100=0.0421, 250=0.03064, 500=0.02808, 1000=0.02424 (USD)", RoHS="RoHS Compliant", Size / Dimension="0.079\" L x 0.049\" W (2.00mm x 1.25mm)", Stock 1=10144, Supplier 1=Digi-Key
R1 R2 R3: library part RES_100k, "Resistor 100kOhm 0402 SMD", Case/Package=0402, Case Code (Metric)=1005, Manufacturer=Yageo, Max Operating Temperature=155°C, Max Power Dissipation=63mW, Min Operating Temperature=-55°C, Package Quantity=1, Resistance=100k, Supplier Part Number 1=311-100KLRCT-ND, Temperature Coefficient=100ppm/°C, Tolerance=1%, Voltage Rating=50V, Case Code (Imperial)=0402, ComponentLink2Description=Datasheet, ComponentLink2URL=https://www.yageo.com/upload/media/product/productsearch/datasheet/rchip/PYu-RC_Group_51_RoHS_L_10.pdf, Composition="Thick Film", Depth=0.5mm, Features="Moisture Resistant", Height=0.016inch, Lead Free="Lead Free", Length=0.039inch, Manufacturer Part Number=RC0402FR-07100KL, Military Standard=Not, Number of Terminations=2, Packaging="Tape and Reel", Power Rating=63mW, REACH SVHC="No SVHC", RoHS=Yes, Supplier 1=Digi-Key, Termination=SMD/SMT, Width=0.02inch, Working Voltage=50V
R4 R5: library part RES_1.5k, "Resistor 1.5kOhm 0402 SMD", Case/Package=0402, Case Code (Metric)=1005, Manufacturer=Yageo, Max Operating Temperature=155°C, Max Power Dissipation=63mW, Min Operating Temperature=-55°C, Package Quantity=1, Power Rating=62.5mW, Resistance=1.5k, Supplier Part Number 1=311-1.50KLRCT-ND, Temperature Coefficient=100ppm/°C, Tolerance=1%, Voltage Rating=50V, Case Code (Imperial)=0402, ComponentLink1Description=Datasheet, ComponentLink1URL=https://www.yageo.com/upload/media/product/productsearch/datasheet/rchip/PYu-RC_Group_51_RoHS_L_10.pdf, Composition="Thick Film", Depth=0.5mm, Features="Moisture Resistant", Height=0.016inch, Lead Free="Lead Free", Length=1mm, Manufacturer Part Number=RC0402FR-071K5L, Military Standard=Not, Number of Terminations=2, Packaging="Tape and Reel", REACH SVHC="No SVHC", RoHS=Yes, Supplier 1=Digi-Key, Termination=SMD/SMT, Width=0.02inch
R6 R7 R8 R9 R10: library part RES_0, "Resistor 0Ohm 0402 SMD", Case/Package=0402, Case Code (Metric)=1005, Manufacturer=Yageo, Max Operating Temperature=155°C, Max Power Dissipation=63mW, Min Operating Temperature=-55°C, Package Quantity=1, Power Rating=62.5mW, Resistance=0, Supplier Part Number 1=311-0.0JRCT-ND, Temperature Coefficient=200ppm/°C, Tolerance=5%, Voltage Rating=50V, Case Code (Imperial)=0402, ComponentLink1Description=Digikey, ComponentLink1URL=https://www.digikey.com/product-detail/en/yageo/RC0402JR-070RL/311-0.0JRCT-ND/729353, ComponentLink2Description=Datasheet, ComponentLink2URL=https://www.yageo.com/upload/media/product/productsearch/datasheet/rchip/PYu-RC_Group_51_RoHS_L_10.pdf, Composition="Thick Film", Contact Plating=Tin,Matte, Depth=0.5mm, Features="Moisture Resistant", Height=0.016inch, Lead Free="Lead Free", Length=1mm, Manufacturer Part Number=RC0402JR-070RL, Military Standard=Not, Number of Terminations=2, Packaging="Tape and Reel", Pricing 1="1=0.10000, 10=0.01300, 25=0.00920, 50=0.00700, 100=0.00510, 250=0.00392, 500=0.00312, 1000=0.00230, 5000=0.00165 (USD)", Radiation Hardening=No, REACH SVHC=Unknown, RoHS=Yes, Stock 1=68160806, Supplier 1=Digi-Key, Termination=SMD/SMT, Width=0.02inch
R11 R15 R16 R17 R18 R19: library part RES_820, "Resistor 820Ohm 0402 SMD", Case/Package=0402, Case Code (Metric)=1005, Manufacturer=Yageo, Max Operating Temperature=155°C, Max Power Dissipation=63mW, Min Operating Temperature=-55°C, Package Quantity=1, Resistance=820, Supplier Part Number 1=311-820LRCT-ND, Temperature Coefficient=100ppm/°C, Tolerance=1%, Voltage Rating=50V, Case Code (Imperial)=0402, Composition="Thick Film", Depth=0.5mm, Features="Moisture Resistant", Height=0.016inch, Lead Free="Lead Free", Length=1mm, Manufacturer Part Number=RC0402FR-07820RL, Military Standard=Not, Number of Terminations=2, Packaging="Tape and Reel", Power Rating=63mW, Pricing 1="1=0.10000, 10=0.01600, 100=0.00640, 1000=0.00289, 2500=0.00251, 5000=0.00207 (USD)", REACH SVHC=Unknown, RoHS=Yes, Stock 1=1640857, Supplier 1=Digi-Key, Termination=SMD/SMT, Width=0.5mm
R12: library part RES_470k, "Resistor 470kOhm 0402 SMD", Case/Package=0402, Case Code (Metric)=1005, Manufacturer=Yageo, Max Operating Temperature=155°C, Max Power Dissipation=63mW, Min Operating Temperature=-55°C, Package Quantity=1, Power Rating=62.5mW, Resistance=470k, Supplier Part Number 1=311-470KLRCT-ND, Temperature Coefficient=100ppm/°C, Tolerance=1%, Voltage Rating=50V, Case Code (Imperial)=0402, ComponentLink1Description=Datasheet, ComponentLink1URL=https://www.yageo.com/upload/media/product/productsearch/datasheet/rchip/PYu-RC_Group_51_RoHS_L_10.pdf, Composition="Thick Film", Depth=0.5mm, Features="Moisture Resistant", Height=0.016inch, Lead Free="Lead Free", Length=1mm, Manufacturer Part Number=RC0402FR-07470KL, Military Standard=Not, Number of Pins=2, Number of Terminations=2, Packaging="Tape and Reel", Pricing 1="1=0.10000, 10=0.01600, 100=0.00640, 1000=0.00289, 2500=0.00251, 5000=0.00207 (USD)", REACH SVHC="No SVHC", RoHS=Yes, Stock 1=2249859, Supplier 1=Digi-Key, Termination=SMD/SMT, Voltage Rating (DC)=50V, Width=0.02inch
R13: library part RES_280k, "Resistor 280kOhm 0402 SMD", Case/Package=0402, Case Code (Metric)=1005, Manufacturer=Yageo, Max Operating Temperature=155°C, Max Power Dissipation=63mW, Min Operating Temperature=-55°C, Power Rating=62.5mW, Resistance=280k, Supplier Part Number 1=YAG3087CT-ND, Temperature Coefficient=100ppm/°C, Tolerance=1%, Voltage Rating=50V, Case Code (Imperial)=0402, ComponentLink1Description=Datasheet, ComponentLink1URL=https://www.yageo.com/upload/media/product/productsearch/datasheet/rchip/PYu-RC_Group_51_RoHS_L_10.pdf, Composition="Thick Film", Contact Plating=Tin,Matte,Lead, Depth=0.5mm, Features="Moisture Resistant", Height=0.016inch, Lead Free="Lead Free", Length=1mm, Manufacturer Part Number=RC0402FR-07280KL, Military Standard=Not, Number of Terminations=2, Packaging="Tape and Reel", Pricing 1="1=0.10000, 10=0.01600, 100=0.00640, 1000=0.00289, 2500=0.00251, 5000=0.00207 (USD)", Radiation Hardening=No, RoHS=Yes, Stock 1=1301983, Supplier 1=Digi-Key, Termination=SMD/SMT, Voltage Rating (DC)=50V, Width=0.5mm
R14 R20 R21 R22 R23 R24 R25: library part RES_1k, "Resistor 1kOhm 0402 SMD", Case/Package=0402, Case Code (Metric)=1005, Manufacturer=Yageo, Max Operating Temperature=155°C, Min Operating Temperature=-55°C, Power Rating=62.5mW, Resistance=1k, Supplier Part Number 1=311-1.00KLRCT-ND, Temperature Coefficient=100ppm/°C, Tolerance=1%, Voltage Rating=50V, Case Code (Imperial)=0402, ComponentLink1Description=https://datasheet.ciiva.com/11819/0900766b80c66297-11819477.pdf?src-supplier=RSComponents, ComponentLink1URL=https://datasheet.ciiva.com/11819/0900766b80c66297-11819477.pdf?src-supplier=RSComponents, ComponentLink2Description=https://datasheet.ciiva.com/12666/pyu-rc0402-51-rohs-l-6-r-12666741.pdf?src-supplier=Mouser, ComponentLink2URL=https://datasheet.ciiva.com/12666/pyu-rc0402-51-rohs-l-6-r-12666741.pdf?src-supplier=Mouser, ComponentLink3Description=https://datasheet.ciiva.com/17063/pyu-rc0402-51-rohs-l-6-r-17063193.pdf?src-supplier=Future+Electronics, ComponentLink3URL=https://datasheet.ciiva.com/17063/pyu-rc0402-51-rohs-l-6-r-17063193.pdf?src-supplier=Future+Electronics, ComponentLink4Description=https://datasheet.ciiva.com/22747/1018594-22747513.pdf?src-supplier=Element14, ComponentLink4URL=https://datasheet.ciiva.com/22747/1018594-22747513.pdf?src-supplier=Element14, ComponentLink5Description=https://datasheet.ciiva.com/7849/1018594-7849869.pdf?src-supplier=Element14, ComponentLink5URL=https://datasheet.ciiva.com/7849/1018594-7849869.pdf?src-supplier=Element14, ComponentLink6Description=https://datasheet.ciiva.com/7983/1018594-7983502.pdf?src-supplier=Element14, ComponentLink6URL=https://datasheet.ciiva.com/7983/1018594-7983502.pdf?src-supplier=Element14, ComponentLink7Description=https://datasheet.ciiva.com/7849/1018594-7849871.pdf?src-supplier=Element14, ComponentLink7URL=https://datasheet.ciiva.com/7849/1018594-7849871.pdf?src-supplier=Element14, Composition="Thick Film", Depth=0.5mm, Digikey Link=https://www.digikey.com/product-detail/en/RNCP1206FTD1K00/RNCP1206FTD1K00CT-ND/2240675/?itemSeq=304982373, Digikey Part=RNCP1206FTD1K00CT-ND, Height=0.32mm, Lead Free="Lead Free", Length=1mm, Manufacturer Part Number=RC0402FR-071KL, Military Standard=Not, Number of Pins=2, Packaging="Tape and Reel", Pricing 1="1=0.10000, 10=0.01600, 100=0.00640, 1000=0.00289, 2500=0.00251, 5000=0.00207 (USD)", REACH SVHC=Unknown, RoHS=Yes, Stock 1=57749807, Supplier 1=Digi-Key, Termination=SMD/SMT, Voltage Rating (DC)=50V, Width=0.5mm
S1 S2 S3 S4: library part Push_Button, "Tactile Switch SPST-NO Top Actuated Surface Mount", Supplier Part Number 1=EG5350CT-ND, Digikey Link=https://www.digikey.com/product-detail/en/TL3305AF160QG/EG5350CT-ND/5816195/?itemSeq=304982361, Digikey Part=EG5350CT-ND, Supplier 1=Digi-Key
S5: library part Push_Button, "Tactile Switch SPST-NO Top Actuated Surface Mount", Digikey Link=https://www.digikey.com/product-detail/en/TL3305AF160QG/EG5350CT-ND/5816195/?itemSeq=304982361, Digikey Part=EG5350CT-ND
U1: "IC PMIC BATT PWR SYST 48VQFN", Current - Supply=-, Manufacturer="Texas Instruments", Manufacturer Part Number=TPS65217CRSLR, Operating Temperature="-40°C ~ 105°C", Package / Case="48-VFQFN Exposed Pad", Supplier Device Package="48-VQFN-EP (6x6)", Supplier Part Number 1=296-34814-6-ND, Voltage - Supply="2.75 V ~ 5.8 V", Applications="Battery Management, Display (LED Drivers), Handheld/Mobile Devices, Power Supply", Category="Integrated Circuits (ICs)", ComponentLink1Description=Datasheet, ComponentLink1URL=http://www.ti.com/lit/ds/slvsb64i/slvsb64i.pdf, Mounting Type="Surface Mount", Packaging=Digi-Reel®, Pricing 1="1=8.01, 10=7.204, 25=6.5516, 100=4.1918, 250=4.11412, 500=4.0365, 750=3.95888 (USD)", RoHS="RoHS Compliant", Stock 1=0, Supplier 1=Digi-Key
U2: "LDO Voltage Regulator", Current - Limit (Min)=-, Current - Output="500mA (Max)", Manufacturer="Texas Instruments", Manufacturer Part Number=TL5209DR, Operating Temperature="-40°C ~ 125°C", Package / Case="8-SOIC (0.154\", 3.90mm Width)", Supplier Device Package=8-SOIC, Supplier Part Number 1=296-21569-6-ND, Voltage - Dropout (Typical)="0.35V @ 500mA", Voltage - Input="2.5 V ~ 16 V", Voltage - Output="2.5 V ~ 6.5 V", Category="Integrated Circuits (ICs)", ComponentLink1Description=http://media.digikey.com/pdf/Data%20Sheets/Texas%20Instruments%20PDFs/TL5209.pdf, ComponentLink1URL=http://media.digikey.com/pdf/Data%20Sheets/Texas%20Instruments%20PDFs/TL5209.pdf, Mounting Type="Surface Mount", Number of Regulators=1, Packaging=Digi-Reel®, Pricing 1="1=1.41, 10=1.244, 25=1.1232, 100=0.9828, 250=0.86192, 500=0.7644, 1000=0.6045 (USD)", Regulator Topology="Positive Adjustable", RoHS="RoHS Compliant", Stock 1=7190, Supplier 1=Digi-Key
X1: library part 16MHz_Crystal, "16MHz ±30ppm Crystal 18pF 40 Ohms HC-49/US", Digikey Link=https://www.digikey.com/product-detail/en/ABLS-16.000MHZ-B4-T/535-10226-1-ND/2184261/?itemSeq=304982364, Digikey Part=535-10226-1-ND

## Via types
v1: diameter 25, hole 13, Top Layer to Bottom Layer, 107 vias
v2: diameter 25, hole 13, Top Layer to Bottom Layer, tented both sides, 4 vias
v3: diameter 30, hole 25, Top Layer to Bottom Layer, 3 vias

## Nets (pads, with @x,y where several pads share a name; then routed paths per layer and width w, separated by ;. In a path a pad name is that pad's centre, name@x,y a point inside that pad or via, vN(x,y) a via of type N, cw(c..) or ccw(c..) an arc to the next point about the centre after c; other vN are vias at no path point)
AREF: C19.2 IC1.20
BUT_1: IC1.12 R1.2 S1.3 S1.4 | length 617.5
  Top Layer w20: v1(989.23,1295.26) 989.72,1286.77 R1.2 990.4,1220.32 990.4,1197.6 1010,1178 1152,1178 1159,1171 1159,1121.06 ; v1(989.23,1395.77) S1.4
  Bottom Layer w20: v1(989.23,1295.26) v1(989.23,1395.77)
BUT_2: IC1.13 R2.2 S2.3 S2.4 | length 365.7
  Top Layer w20: R2.2@1209,1220.72 R2.2 1208.72,1286.75 v1(1209.23,1296.26) ; v1(1209.23,1396.77) S2.4
  Bottom Layer w20: v1(1209.23,1296.26) v1(1209.23,1396.77)
BUT_3: IC1.14 R3.2 S3.3 S3.4 | length 556.2
  Top Layer w20: 1259,1169 1274,1184 1409,1184 1423.89,1198.89 1423.89,1221.17 R3.2 1424.72,1286.77 S3.3@1424.23,1287.26 ; S3.3 S3.4
D+: D9.1 J3.3 | length 99.8
  Top Layer w6: J3.3 398.69,1445.67 409.87,1456.85 D9.1
D-: D9.6 J3.2 | length 503.7
  Top Layer w6: J3.2 260,1557.36 260,1630 310,1680 410,1680 482.6,1607.4 D9.6
DTR: C22.1 IC2.2 R22.1 | length 106.9
  Top Layer w6: R22.1 59.22,1135.64 C22.1 124.75,1135.75 125,1136 IC2.2
GND: C1.2 C2.2 C3.2 C4.2 C5.1 C6.1 C7.2 C8.2 C9.1 C10.2 C11.1 C12.2 C13.1 C14.1 C15.1 C16.2 C17.2 C18.2 C19.1 C20.1 C21.1 C23.1 C24.1 C25.2 D2.1 D3.1 D4.1 D5.1 D6.1 D8.1 D9.2 IC1.3 IC1.5 IC1.21 IC2.7 IC2.18 IC2.21 IC2.25 IC2.26 J1.2 J2.6 J3.5 J3.SH1 J3.SH2 J3.SH3 J3.SH4 R11.2 R12.1 S1.1 S1.2 S2.1 S2.2 S3.1 S3.2 S4.3 S4.4 S5.1 S5.2 U1.30 U1.41 U1.49 U2.5 U2.6 U2.7 U2.8 | length 1476.5
  Top Layer w6: IC2.7 v1(192,1007.8) ; U2.8 v1(245,524) ; U2.7 v1(245,574) ; U2.6 v1(245,624) ; U2.5 244,674 v1(245,673) ; v1(340,982.2) IC2.21 ; v1(341,905.43) IC2.18 ; v1(341,1110.16) IC2.26 IC2.25 ; C16.2 v1(532,574) ; v1(520,1416) D9.2 ; C24.1@520.32,870 C24.1 v1(560,870) ; C23.1 v1(561,949) ; C18.2 C17.2 540.32,713.61 R12.1 v1@540.72,739 ; v1(649,657) 649,670 659.65,680.65 C15.1 ; v1(650,729) 650.43,728.57 R11.2 ; v1(752,537) 782.68,537 C3.2 ; U1.41 893.62,358.62 v1(889.68,354.68) U1.49 877.87,327.13 U1.30 ; v2(1040,1124) 1106.06,1124 1109,1121.06 ; v2(1109.23,1234) v1(1109.23,1295.26) ; C14.1 1739.68,669.68 v1(1740,670)
  Bottom Layer w6: v2(1040,1124) 1040,1164.77 v2(1109.23,1234)
  other v1: 807.65,49 1027.35,49 695.35,50 1780,130 670,199.65 1780,210 810.94,275.94 850.32,275.94 889.68,275.94 929.06,275.94 1780,290 810.94,315.32 850.32,315.32 889.68,315.32 929.06,315.32 810.94,354.68 850.32,354.68 929.06,354.68 1779.64,370 1159,383 1269,383 1379,383 1489,383 1599,383 810.94,394.06 850.32,394.06 889.68,394.06 929.06,394.06 1779.35,449 1066,505.35 847,603.71 928,604.35 541,739 1329.23,1296.26 1543.23,1298.26 1109.23,1585.26 1329.23,1586.26 1543.23,1588.26 58.26,1881.77 348.26,1881.77 440.26,1881.77 730.26,1881.77
LED1: IC1.32 R15.2 | length 206.1
  Top Layer w6: IC1.32 1151.68,702.32 1159,695 R15.2
LED2: IC1.1 R16.2 | length 170.9
  Top Layer w6: IC1.1 1208.76,712.24 1269,652 R16.2
LED3: IC1.2 R17.2 | length 239.7
  Top Layer w6: IC1.2 1240.66,755.28 1240.66,721.34 1279,683 1341,683 1379,645 R17.2
LED4: IC1.9 R18.2 | length 204.2
  Top Layer w6: IC1.9 1486.32,698.68 1489,696 R18.2
LED5: IC1.10 R19.2 | length 313.7
  Top Layer w6: IC1.10 1541.74,844.26 1599,787 R19.2
MISO: IC1.16 J2.1
MOSI: IC1.15 J2.4
NetC17_1: C17.1 R12.2 R13.1 U2.4 | length 156.6
  Top Layer w20: U2.4 395.98,673.31 429.69,673.31 435.6,667.4 458.32,667.4 R13.1 459.83,667.54 473.54,667.54 479.03,673.03 504.7,673.03 C17.1 505.28,674.39 R12.2
NetC20_2: C20.2 IC1.7 X1.2
NetC21_2: C21.2 IC1.8 X1.1
NetC24_2: C24.2 IC2.17 IC2.19 | length 181.6
  Top Layer w6: IC2.17 445.16,879.84 450.08,874.92 ; IC2.19 443.98,931.02 451,924 451,875.84 450.08,874.92 ; C24.2 455,870 450.08,874.92
NetD2_2: D2.2 R15.1 | length 73.3
  Top Layer w6: D2.2 R15.1
NetD3_2: D3.2 R16.1 | length 73.3
  Top Layer w6: D3.2 R16.1
NetD4_2: D4.2 R17.1 | length 73.3
  Top Layer w6: D4.2 R17.1
NetD5_2: D5.2 R18.1 | length 73.3
  Top Layer w6: D5.2 R18.1
NetD6_2: D6.2 R19.1 | length 73.3
  Top Layer w6: D6.2 R19.1
NetD7_1: D7.1 IC2.23 | length 188.4
  Top Layer w6: IC2.23 407.09,1033.73 441.73,1033.73 449,1041 449,1122 461,1134 D7.1
NetD7_2: D7.2 R23.1 | length 54.3
  Top Layer w6: D7.2 R23.1
NetD8_2: D8.2 R25.1
NetD10_1: D10.1 IC2.22 | length 127.7
  Top Layer w6: IC2.22 442.8,1007.8 461,1026 461,1045.49 464.51,1049 D10.1
NetD10_2: D10.2 R24.1 | length 54.3
  Top Layer w6: D10.2 R24.1
NetIC2_1: IC2.1 R20.1 | length 618.3
  Top Layer w6: IC2.1 127.87,1158.72 155.25,1158.72 233.5,1080.47 233.5,911.5 339.18,805.82 436.88,805.82 461.06,830 R20.1
NetIC2_5: IC2.5 R21.1 | length 542.1
  Top Layer w6: IC2.5 176.88,1058.98 217.5,1018.36 217.5,904.87 332.55,789.82 443.51,789.82 448.69,795 R21.1
NetS4_1: S4.1 S4.2 U1.25 | length 2161.1
  Top Layer w6: S4.1 S4.2 730.26,1722.74 761,1692 761,833 911,683 970,683 1114.5,538.5 1114.5,328.5 v1(1116,327) ; U1.25 1011.72,248.39 1035.11,225 v1(1116,225)
  Bottom Layer w6: v1(1116,225) v1(1116,327) v1@1117,326
NetU1_4: U1.4 U1.5 | length 14.6
  Top Layer w6: U1.5 U1.4@752.87,373.18
P_BYPASS: C4.1 U1.47 | length 97.7
  Top Layer w6: U1.47 799.13,474.13 805,480 839,480 840.01,481.01 840.01,490.42 848,498.41 C4.1@848,509.65
P_INT_LDO: C3.1 U1.48 | length 50.7
  Top Layer w6: C3.1 783.39,502.29 U1.48
P_L1: L1.1 U1.20 | length 92.6
  Top Layer w6: L1.1@882.25,130 882.25,171.75 893.62,183.12 U1.20
P_L2: L2.1 U1.23 | length 92.8
  Top Layer w6: U1.23 940.87,190.13 952.75,178.25 L2.1@952.75,130
P_L3: L3.1 U1.31 | length 86.5
  Top Layer w6: U1.31 1013.87,342.87 1031.58,360.58 1065.33,360.58 L3.1
PMIC_POWR_EN: IC1.11 U1.9 | length 746.7
  Top Layer w6: v1(634,377) 715.37,295.63 U1.9 ; v1(634,465) 634,502 729,597 778,597 v1(853,672)
  Bottom Layer w6: v1(634,377) v1(634,465) ; v1(853,672) 891,710 v1(1017,710)
PWR_LEDR: D1.1 R11.1 | length 65
  Top Layer w20: R11.1 D1.1
RESET: C22.2 IC1.29 J2.5 R14.1 S5.3 S5.4 | length 2262.9
  Top Layer w6: C22.2@24.68,1135 24.28,1135.39 25.28,1136.39 25.28,1187 25.28,1465.28 58.26,1498.26 58.26,1761.77 348.26,1761.77 348.26,1805.26 362,1819 763,1819 803,1779 v1(803,1273) ; v1(828,1189) 828,1142 J2.5
  Bottom Layer w6: v1(803,1273) 828,1248 v1(828,1189)
RX: IC1.30 R20.2 | length 699.3
  Top Layer w6: R20.2 v1(735,830) ; v1(923,768) 1002,768 1109.76,875.76 IC1.30
  Bottom Layer w6: v1(735,830) 797,768 v1(923,768)
SCK: IC1.17 J2.3 R25.2
SCL: IC1.28 R4.1 U1.28 | length 964.3
  Top Layer w6: U1.28 987.48,295.27 1005.7,295.27 1028.06,272.91 1028.06,265.99 1033.34,260.72 v1(1547.72,260.72) ; v1(1605,317.27) 1639.5,351.77 1639.5,607.5
  Bottom Layer w6: v1(1547.72,260.72) 1604.27,317.27 v1(1605,317.27)
SDA: IC1.27 R5.1 U1.27 | length 1211.8
  Top Layer w6: U1.27 987.48,279.52 1004.48,279.52 1016.06,267.94 1016.06,261.02 1028.36,248.72 1522.28,248.72 1536,235 1626,235 v1(1649,258) ; R5.1 1620,643.97 1654,609.97 1654,348 1647,341 v1(1647,320)
  Bottom Layer w6: v1(1647,320) 1647,272 1642,267 1650,259 v1(1649,258)
SYS_5V: C7.1 C8.1 C10.1 C12.1 C16.1 C25.1 IC1.4 IC1.6 IC1.18 J2.2 R1.1 R2.1 R3.1 R14.2 U1.2 U1.7 U1.8 U1.21 U1.22 U1.32 U1.39 U1.42 U2.2 | length 6053.2
  Top Layer w6: C16.1 465.69,591.69 473,599 560.43,599 666.43,705 714,705 ; v1(681,378) 681,349.59 719.22,311.38 U1.8 U1.7@752.87,325.94 ; 715,406 715.13,405.87 U1.2 ; U1.42 878.23,452.48 878.23,467.83 888,477.59 888,516 893.97,521.97 926.33,521.97 C12.1 ; U1.21 909.37,193.51 917.5,185.38 v1(917.5,180.5) ; U1.21@910.56,217.87 U1.22@923.93,217.87 ; U1.39 925.12,468.71 933,476.59 933,518.65 C12.1 ; C12.1@936.49,523.65 929,523.65 C12.1 ; U1.32 1005.48,358.62 1016.05,369.19 1016.05,409.69 1031,424.65 ; 1019.86,424.65 1031,424.65 ; v1(1066,424.65) 1031,424.65
  Top Layer w20: v1(22,1027) 22,775 61,736 195.65,736 202.65,729 v1(204,729) ; 60.72,1187 61.54,1187.83 61.54,1209.54 76.45,1224.45 95.45,1224.45 v1(96,1225) ; v1(277,743) 330,690 330,560 ; C16.1 U2.2 344,574 330,560 ; v1(681,465) 681,506.31 741.01,566.32 801.83,566.32 808.51,559.64 891.17,559.64 891.53,560 907,560 929,538 C12.1@929,523.65 ; 714,705 862.13,705 903.13,664 951,664 v1(1014,601) 990,577 990,490 984.86,484.86 973.14,484.86 ; 715,406 414,406 330,490 330,560 ; 938.5,484.86 973.14,484.86 ; R1.1 805,1221 ; 1019.86,424.65 1019.86,438.14 973.14,484.86 ; v1(1049,636) 983,702 918.87,702 845.4,775.47 845.4,824.6 J2.2 784,886 784,1200 805,1221 ; R2.1 1157.78,1205.5 1070.5,1205.5 1049,1227 1049,1331 1021,1359 ; R3.1 1289,1222 1269,1242 1269,1331 1241,1359 1021,1359 ; 805,1221 943,1359 1021,1359
  Bottom Layer w20: v1@22,1028.31 22,1151 v1(96,1225) ; v1(204,729) 218,743 v1(277,743) ; v1(681,378) v1(681,465) ; v1(888.35,49) 917.5,49 ; v1(946.65,49) 917.5,49 ; v1(1014,601) v1(1049,636) ; v1(1066,424.65) 1019.65,424.65 985,390 985,285 917.5,217.5 v1(917.5,180.5) 917.5,49
TX: IC1.31 R21.2 | length 701.5
  Top Layer w6: R21.2 549,795 552,798 v1(652,798) ; v1(958,735.03) 986,735.03 1095.23,844.26 IC1.31
  Bottom Layer w6: v1(652,798) 714.97,735.03 v1(958,735.03)
USB_DC: C2.1 C23.2 F1.2 IC2.4 IC2.20 U1.12 | length 2689
  Top Layer w6: 72,1062 94.57,1084.57 IC2.4 168.43,1084.57 169,1084 ; 316,960.24 319.63,956.61 IC2.20 444.39,956.61 452,949 C23.2 ; 715,240 722.2,247.2 U1.12@752.87,247.2
  Top Layer w20: 72,1062 72,820 127,765 213,765 275,703 275,445 515,205 595,205 614.65,224.65 ; 169,1084 v1(192,1084) ; 316,960.24 307.5,968.74 v1(307.5,1127.5) 372,1192 452,1192 680,1420 F1.2 ; C2.1 614.65,224.65 ; 715,240 630,240 614.65,224.65
  Bottom Layer w20: v1(192,1084) 264,1084 v1(307.5,1127.5)
USBDM: D9.4 IC2.16 | length 990.8
  Top Layer w6: IC2.16 339.75,854.25 265.5,928.5 265.5,1121.56 359.94,1216 426,1216 587,1377 587,1490 557.4,1519.6 D9.4
USBDP: D9.3 IC2.15 | length 896.5
  Top Layer w6: IC2.15 341.34,828.66 249.5,920.5 249.5,1128.19 353.31,1232 417,1232 557.4,1372.4 D9.3
Vcc: R22.2 R23.2 R24.2 | length 1307.8
  Top Layer w10: R22.2 23.78,1071.22 47,1048 47,798 v1(65,780)
  Top Layer w20: v1(188,808) 265,808 305,768 v1(599,768) ; v1(599,859) 713.72,973.72 R24.2 R23.2
  Bottom Layer w20: v1(65,780) 160,780 v1(188,808) ; v1(599,768) v1(599,859)
VDCDC1: L1.2 R6.1 U1.19 | length 236.7
  Top Layer w6: L1.2@809,130 809,159 822.14,172.14 860.02,172.14 877.87,189.99 U1.19
  Top Layer w20: R6.1 745,116 759,130 L1.2 L1.2@809,130
VDCDC2: C6.2 L2.2 U1.24 | length 1060.4
  Top Layer w6: U1.24 956.61,198.85 975.46,180 1008,180 1021.25,166.75 L2.2@1021.25,130 ; C6.2 1719,210 1727,202 1727,45 v3(1750,22)